# EAGLE board Mighty Lappi-Maimu (EAGLE 9.7.0)

Size 233.15 x 59.69 mm. Coordinates in mm from the lower left corner, seen from the top.
Outline: 0,0 233.15,0 233.15,59.69 0,59.69 0,0
Copper layers (1*16): Top 0.035mm / dielectric 1.5mm / Bottom 0.035mm
Design rules "default": minimum track width 6mil, minimum drill 0.35mm, track to track 6mil, track to pad 6mil, pad to pad 6mil, via to via 6mil, smd to smd 6mil, copper to edge 40mil, drill to drill 6mil, minimum pad ring 10mil, minimum via ring 8mil, stop-mask expansion 4mil, vias tented up to drill 0mil, thermal gap 10mil

## Footprints (pad centres in the part's own frame; a part is rotated, then mirrored left to right if it is on the bottom)
LEDRD254W60D565H860B = drill 0.981 pad 1.581: 1 -1.27,0; 2 1.27,0
RESAD1016W63L850D250B = drill 0.83 pad 1.43: 1 -5.08,0; 2 5.08,0
SWITCH-MOMENTARY-PTH-6.5MM = drill 1.016 pad 1.88: 1 -3.251,2.261; 2 3.251,2.261; 3 -3.251,-2.261; 4 3.251,-2.261
ARDUINO-UNO-R3-SHIELD = drill 1.016 pad 1.88: 3.3V 24.13,-2.54; 5V 24.13,0; A0 24.13,12.7; A1 24.13,15.24; A2 24.13,17.78; A3 24.13,20.32; A4 24.13,22.86; A5 24.13,25.4; AREF -24.13,-13.97; D2 -24.13,20.32; D3 -24.13,17.78; D4 -24.13,15.24; D5 -24.13,12.7; D6 -24.13,10.16; D7 -24.13,7.62; D8 -24.13,3.81; D9 -24.13,1.27; D10 -24.13,-1.27; D11 -24.13,-3.81; D12 -24.13,-6.35; D13 -24.13,-8.89; GND@0 24.13,2.54; GND@1 24.13,5.08; GND@2 -24.13,-11.43; IOREF 24.13,-7.62; NC 24.13,-10.16; RES 24.13,-5.08; RX -24.13,25.4; SCL -24.13,-19.05; SDA -24.13,-16.51; TX -24.13,22.86; VIN 24.13,7.62

## Placement (x,y rotation side)
D1  RED  [LEDRD254W60D565H860B]  225.55,16.18 180 top
R1  10k  [RESAD1016W63L850D250B]  117.6,11.1 90 top
R2  10k  [RESAD1016W63L850D250B]  127.76,11.1 90 top
R3  10k  [RESAD1016W63L850D250B]  137.92,11.1 90 top
R4  10k  [RESAD1016W63L850D250B]  148.08,11.1 90 top
R5  10k  [RESAD1016W63L850D250B]  158.24,11.1 90 top
R6  10k  [RESAD1016W63L850D250B]  168.4,11.1 90 top
R7  10k  [RESAD1016W63L850D250B]  178.56,11.1 90 top
R8  10k  [RESAD1016W63L850D250B]  188.72,11.1 90 top
R9  10k  [RESAD1016W63L850D250B]  198.88,11.1 90 top
R10  10k  [RESAD1016W63L850D250B]  209.04,11.1 90 top
R11  220  [RESAD1016W63L850D250B]  226.82,28.88 90 top
S1  SWITCH_MOMENTARY  [SWITCH-MOMENTARY-PTH-6.5MM]  125.22,27.61 90 top
S2  SWITCH_MOMENTARY  [SWITCH-MOMENTARY-PTH-6.5MM]  135.38,27.61 90 top
S3  SWITCH_MOMENTARY  [SWITCH-MOMENTARY-PTH-6.5MM]  145.54,27.61 90 top
S4  SWITCH_MOMENTARY  [SWITCH-MOMENTARY-PTH-6.5MM]  155.7,27.61 90 top
S5  SWITCH_MOMENTARY  [SWITCH-MOMENTARY-PTH-6.5MM]  165.86,27.61 90 top
S6  SWITCH_MOMENTARY  [SWITCH-MOMENTARY-PTH-6.5MM]  176.02,27.61 90 top
S7  SWITCH_MOMENTARY  [SWITCH-MOMENTARY-PTH-6.5MM]  186.18,27.61 90 top
S8  SWITCH_MOMENTARY  [SWITCH-MOMENTARY-PTH-6.5MM]  196.34,27.61 90 top
S9  SWITCH_MOMENTARY  [SWITCH-MOMENTARY-PTH-6.5MM]  206.5,27.61 90 top
S10  SWITCH_MOMENTARY  [SWITCH-MOMENTARY-PTH-6.5MM]  115.06,27.61 90 top
U1  ARDUINO-UNO-R3-SHIELD  [ARDUINO-UNO-R3-SHIELD]  47.88,29.84 270 top

## Library data of the parts
D1 = Tinkercad; CATEGORY: Opto-Electronic; SUB-CATEGORY: LED; VALUE: LED_RED
R1-R11 S1-S10 U1 = Tinkercad

## Nets
D1_A: D1.1 R11.1
U1_5V: S1.1 S1.2 S2.1 S2.2 S3.1 S3.2 S4.1 S4.2 S5.1 S5.2 S6.1 S6.2 S7.1 S7.2 S8.1 S8.2 S9.1 S9.2 S10.1 S10.2 U1.5V
U1_D2: R1.2 S10.3 S10.4 U1.D2
U1_D3: R2.2 S1.3 S1.4 U1.D3
U1_D4: R3.2 S2.3 S2.4 U1.D4
U1_D5: R4.2 S3.3 S3.4 U1.D5
U1_D6: R5.2 S4.3 S4.4 U1.D6
U1_D7: R6.2 S5.3 S5.4 U1.D7
U1_D8: R7.2 S6.3 S6.4 U1.D8
U1_D9: R8.2 S7.3 S7.4 U1.D9
U1_D10: R9.2 S8.3 S8.4 U1.D10
U1_D11: R10.2 S9.3 S9.4 U1.D11
U1_D12: R11.2 U1.D12
U1_GND: D1.2 R1.1 R2.1 R3.1 R4.1 R5.1 R6.1 R7.1 R8.1 R9.1 R10.1 U1.GND@0 U1.GND@1 U1.GND@2

## Tracks (layer width: path | path; a pad name or v marks a point on that pad's centre or on a via)
D1_A  (1 unrouted)
U1_5V  (20 unrouted)
U1_D2  (3 unrouted)
U1_D3  (3 unrouted)
U1_D4  (3 unrouted)
U1_D5  (3 unrouted)
U1_D6  (3 unrouted)
U1_D7  (3 unrouted)
U1_D8  (3 unrouted)
U1_D9  (3 unrouted)
U1_D10  (3 unrouted)
U1_D11  (3 unrouted)
U1_D12  (1 unrouted)
U1_GND  (13 unrouted)